# Altium PCB PCB_OSUKeyboard.pcbdoc
Units mil, origin at the board's own origin, x right, y up, seen from the top; angles counter-clockwise.
Board outline 4283.59 x 3769.8 mil, 2 copper layers (Top Layer, Bottom Layer); 79 components, 50 nets, 357 pads, 74 vias.
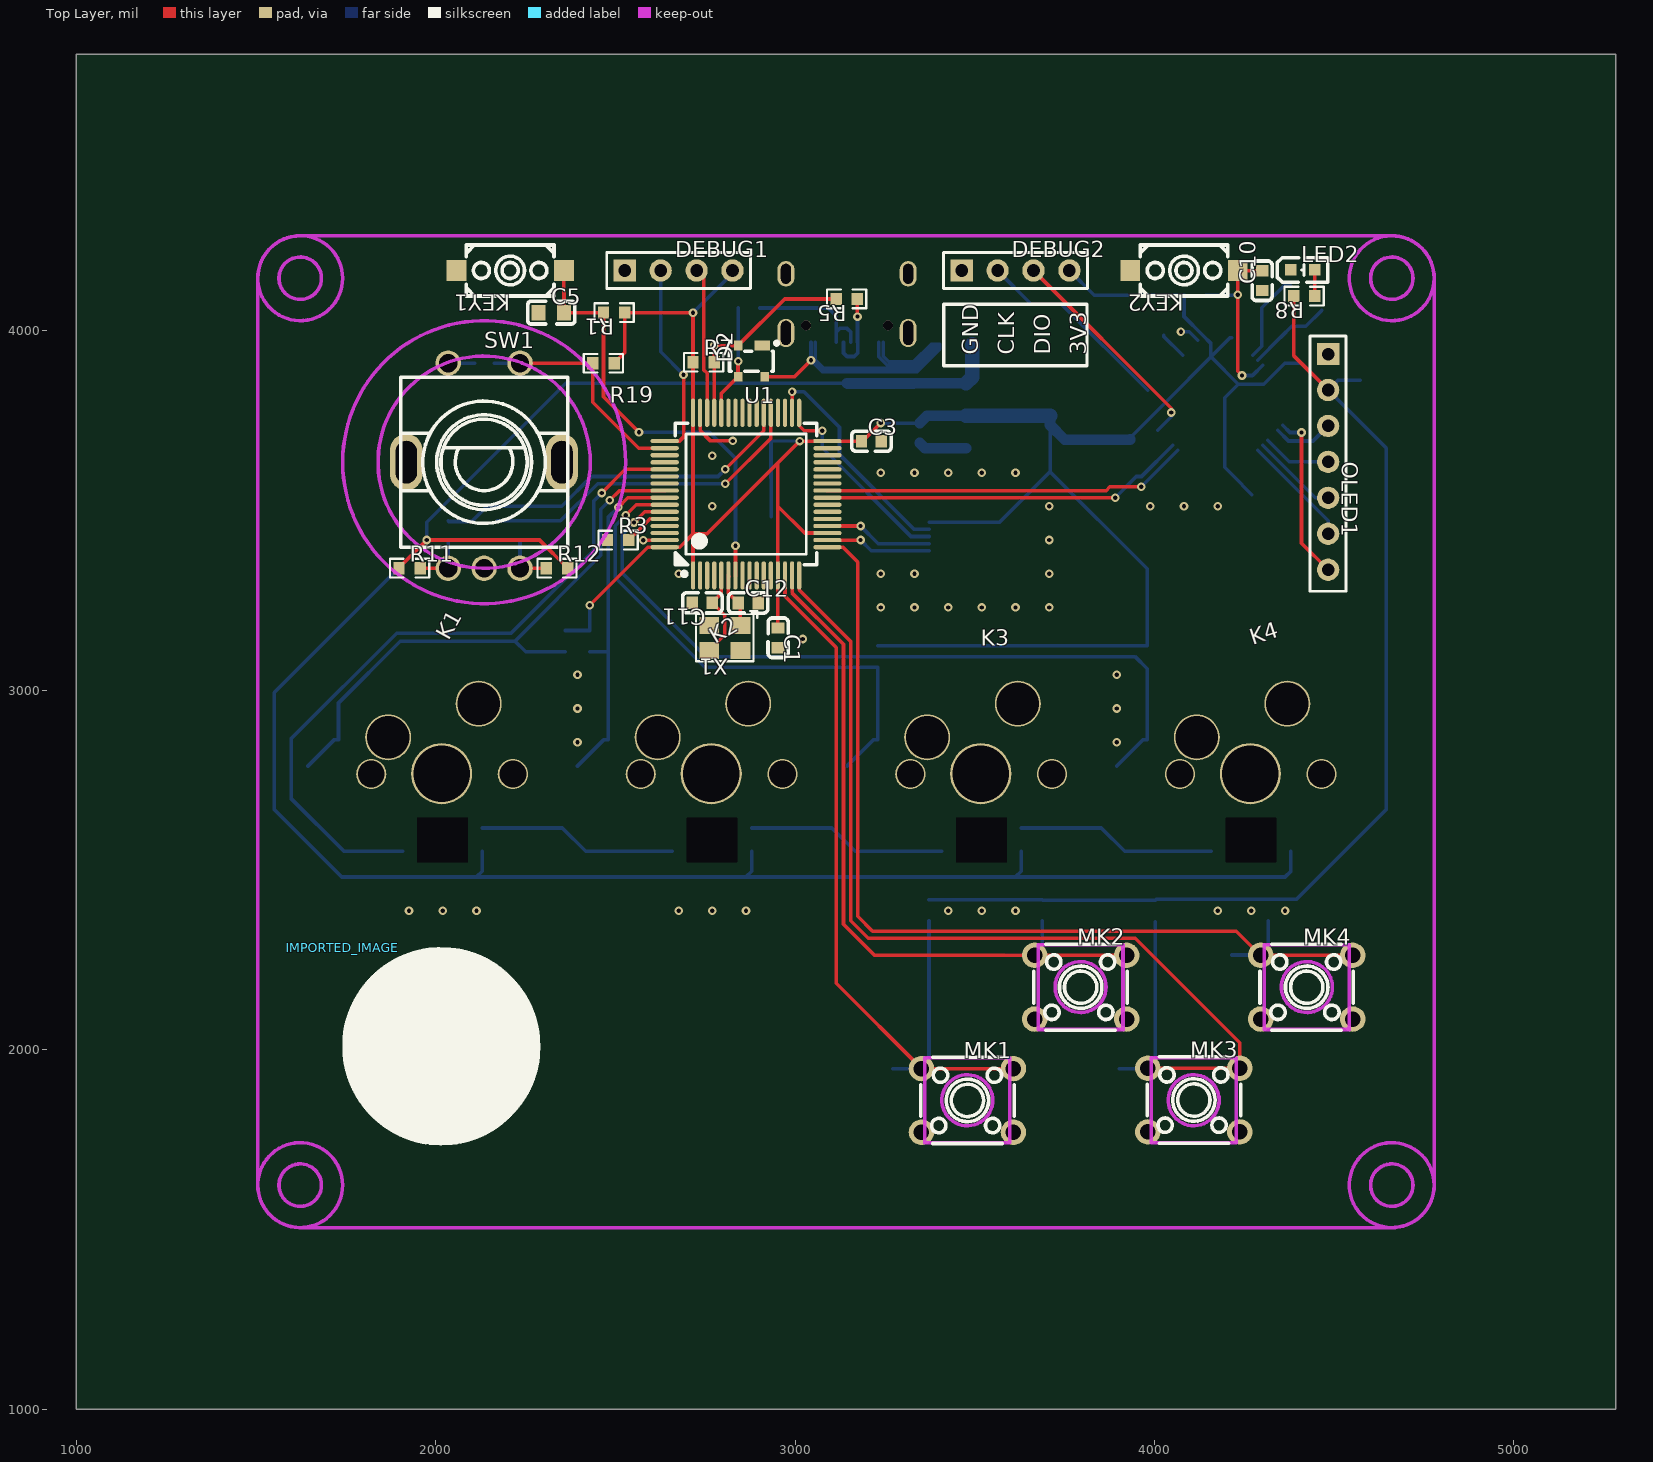
[diagram p0: Top Layer view]
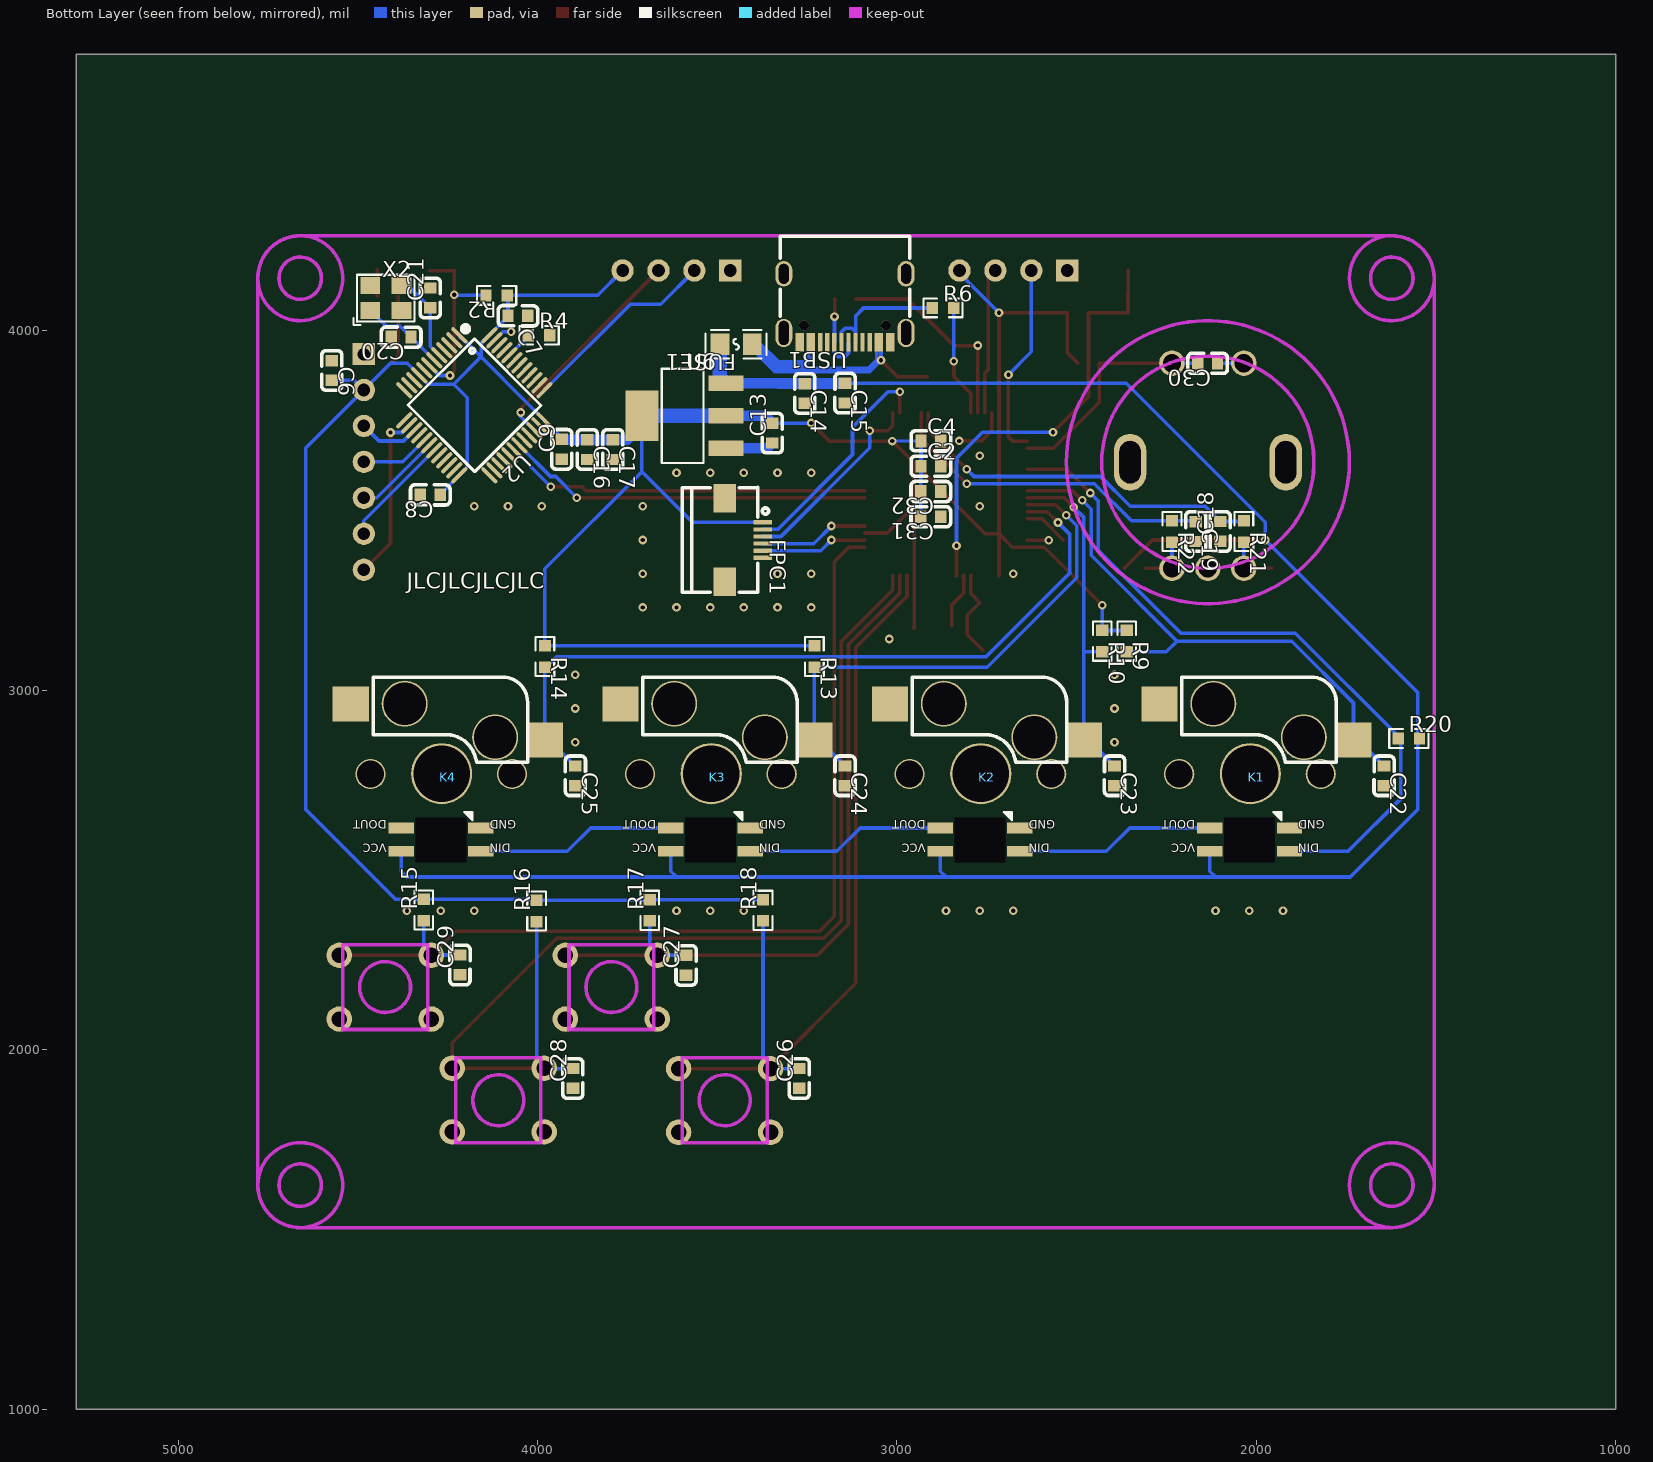
[diagram p1: Bottom Layer view, seen from below]

## Layer stack, top to bottom
Top Layer: signal copper (thickness not stored)
Dielectric: dielectric 12.6, FR-4, Dk 4.8
Bottom Layer: signal copper (thickness not stored)

## Board outline
5283.59,1000 1000,1000 1000,4769.8 5283.59,4769.8

## Components (designator, comment, footprint, x,y, rotation, side; value= is the part's Value field where it differs from the comment)
C1 "0.1u" C0603#1 2952.71,3145.9 r270 top
C2 "0.1u" C0603#2 2905.41,3623.5 r0 bottom
C3 "0.1u" C0603#1 3212.71,3692.9 r0 top
C4 "0.1u" C0603#2 2905.41,3693.9 r0 bottom
C5 "0.1u" C0603#3 2321.76,4050.9 r0 top
C6 "0.1u" C0603#2 4572.81,3889.9 r90 bottom
C7 "0.1u" C0603#2 4054.81,4041.9 r180 bottom
C8 "0.1u" C0603#2 4298.81,3543.9 r180 bottom
C9 "0.1u" C0603#2 3932.71,3670.9 r270 bottom
C10 "0.1u" C0603#1 4299.81,4139.9 r90 top
C11 "20pF" C0603#1 2741.76,3243.9 r180 top
C12 "20pF" C0603#1 2869.76,3242.9 r0 top
C13 "10u" C0603#2 3346.71,3715.9 r270 bottom
C14 "10u" C0603#2 3256.71,3825.9 r90 bottom
C15 "0.1u" C0603#2 3144.71,3826.9 r90 bottom
C16 "0.1u" C0603#2 3861.71,3669.9 r90 bottom
C17 "10u" C0603#2 3790.71,3669.9 r90 bottom
C18 "0.1u" C0603#2 2100.61,3442 r270 bottom
C19 "0.1u" C0603#2 2168.91,3441.4 r90 bottom
C20 "20p" C0603#2 4379.71,3982.9 r180 bottom
C21 "20p" C0603#2 4298.71,4091.9 r270 bottom
C22 "0.1u" C0603#2 1644.71,2761.9 r90 bottom
C23 "0.1u" C0603#2 2394.71,2761.9 r90 bottom
C24 "0.1u" C0603#2 3144.71,2761.9 r90 bottom
C25 "0.1u" C0603#2 3894.81,2761.9 r90 bottom
C26 "0.1u" C0603#2 3271.71,1919.9 r270 bottom
C27 "0.1u" C0603#2 3586.71,2234.9 r270 bottom
C28 "0.1u" C0603#2 3901.71,1919.9 r270 bottom
C29 "0.1u" C0603#2 4215.71,2235.9 r270 bottom
C30 "0.1u" C0603#2 2135.71,3909.9 r180 bottom
C31 "0.1u" C0603#2 2906.11,3482.9 r180 bottom
C32 "1u" C0603#2 2906.11,3553.3 r180 bottom
D2 "PRTR5V0U2X,215" SOT-143_L2.9-W1.3-P1.92-LS2.3-BR 2878.76,3915.9 r90 top
DEBUG1 "HDR-M-2.54_1x4" HDR-M-2.54_1X4 2676.01,4168.17 r0 top
DEBUG2 "HDR-M-2.54_1x4" HDR-M-2.54_1X4 3613.53,4168.17 r0 top
FPC1 "AFC01-S06FCA-00" FPC-SMD_P0.50-6P_AFC01-S06FCA-00 3426.01,3418.17 r90 bottom
FUSE1 "SMD0805B050TF" F0805 3447.76,3962.9 r180 bottom
IMPORTED_IMAGE "IMPORTED_IMAGE" IMPORTED_IMAGE 1740.94,2284.35 r0 top
K1 "凯华轴座下灯位" 凯华轴座下灯位 2016.83,2766.9 r0 top
K2 "凯华轴座下灯位" 凯华轴座下灯位 2766.84,2766.9 r0 top
K3 "凯华轴座下灯位" 凯华轴座下灯位 3516.86,2766.9 r0 top
K4 "凯华轴座下灯位" 凯华轴座下灯位 4266.87,2766.9 r0 top
KEY1 "K2-3.6×6.1_SMD" KEY-SMD_2P-L6.2-W3.6-LS8.0 2207.26,4168.17 r180 top
KEY2 "K2-3.6×6.1_SMD" KEY-SMD_2P-L6.2-W3.6-LS8.0 4082.3,4168.17 r180 top
LED2 "19-217/BHC-ZL1M2RY/3T" LED0603-R-RD_BLUE 4412.77,4169.9 r0 top
MK1 "K4-6×6_TH" KEY-TH_4P-L6.0-W6.0-P4.50-LS6.5 3479.76,1858.9 r0 top
MK2 "K4-6×6_TH" KEY-TH_4P-L6.0-W6.0-P4.50-LS6.5 3794.76,2173.9 r0 top
MK3 "K4-6×6_TH" KEY-TH_4P-L6.0-W6.0-P4.50-LS6.5 4109.76,1859.9 r0 top
MK4 "K4-6×6_TH" KEY-TH_4P-L6.0-W6.0-P4.50-LS6.5 4423.76,2173.9 r0 top
OLED1 "CONN_01X07" HDR-M-2.54_1X7 4483.31,3635.6 r270 top
R1 "10k" R0603#1 2496.71,4050.9 r180 top
R2 "10k" R0603#2 4113.81,4098.9 r180 bottom
R3 "10k" R0603#1 2507.71,3417.9 r0 top
R4 "10k" R0603#2 3995.81,3987.9 r0 bottom
R5 "22" R0603#1 3143.81,4088.9 r180 top
R6 "22" R0603#2 2871.71,4063.9 r0 bottom
R7 "1.5k" R0603#1 2745.71,3912.9 r0 top
R8 "1k" R0603#1 4416.81,4096.9 r180 top
R9 "10k" R0603#2 2360.71,3136.9 r90 bottom
R10 "10k" R0603#2 2428.71,3136.9 r90 bottom
R11 "10k" R0603#1 1927.71,3339.9 r0 top
R12 "10k" R0603#1 2337.71,3339.9 r0 top
R13 "10k" R0603#2 3229.71,3093.9 r90 bottom
R14 "10k" R0603#2 3979.71,3093.9 r90 bottom
R15 "10k" R0603#2 4316.71,2388.9 r270 bottom
R16 "10k" R0603#2 4002.71,2385.9 r270 bottom
R17 "10k" R0603#2 3687.71,2387.9 r270 bottom
R18 "10k" R0603#2 3372.71,2387.9 r270 bottom
R19 "10k" R0603#1 2466.76,3909.9 r0 top
R20 "10k" R0603#2 1575.71,2865.9 r0 bottom
R21 "10k" R0603#2 2034.71,3441.7 r90 bottom
R22 "10k" R0603#2 2234.71,3441.7 r90 bottom
SW1 "EC11E18244A5" SW-TH_EC11E18244A5 2134.76,3624.9 r0 top
U1 "STM32F303RBT6" LQFP-64_L10.0-W10.0-P0.50-LS12.0-BL 2863.76,3545.9 r0 top
U2 "STM32F030CCT6" LQFP-48_L7.0-W7.0-P0.50-LS9.0-BL 4176.05,3793.16 r135 bottom
U6 "AMS1117-3.3" SOT-223-3_L6.5-W3.4-P2.30-LS7.0-BR 3592.76,3763.9 r0 bottom
USB1 "KH-TYPE-C-16P" USB-C-SMD_KH-TYPE-C-16P 3144.78,4063.9 r180 bottom
X1 "8MHz" OSC-SMD_4P-L3.2-W2.5-BL#1 2804.76,3145.9 r180 top
X2 "8MHz" OSC-SMD_4P-L3.2-W2.5-BL#2 4422.29,4091.43 r0 bottom

## Footprints (in the part's own frame and the unit in brackets; to place one, negate y for a bottom-side part, rotate by r counter-clockwise, add the part's x,y. Pads: shape width x height; smd on the part's side, far side on the other; paste and mask are expansions set on the pad)
C0603#1 [mm]
  rect 0.8x0.9 smd paste+0 mask+0.051: 1(-0.7,0) 2(0.7,0)
  silkscreen extent -1.41,-0.71 1.39,0.72
C0603#2 [mm]
  rect 0.8x0.9 smd paste+0 mask+0.051: 1(0.7,0) 2(-0.7,0)
  silkscreen extent -1.39,-0.72 1.41,0.71
C0603#3 [mm]
  rect 1x1.1 smd paste+0 mask+0.102: 1(-0.9,0) 2(0.9,0)
  silkscreen extent -1.65,-0.8 1.65,0.8
F0805 [mm]
  rect 1.335x1.5 smd paste-100 mask+0.051: 1(1.142,0) 2(-1.142,0)
  silkscreen extent -2.16,-1.02 2.16,1.02
FPC-SMD_P0.50-6P_AFC01-S06FCA-00 [mm]
  rect 0.3x1.3 smd paste+0 mask+0.051: 1(1.248,-1.339) 2(0.748,-1.339) 3(0.248,-1.339) 4(-0.252,-1.339) 5(-0.752,-1.339) 6(-1.252,-1.339)
  rect 2x1.6 smd paste+0 mask+0.051: 7(2.95,1.339) 8(-2.95,1.339)
  silkscreen extent -3.7,-1.75 3.72,4.36
HDR-M-2.54_1X4 [mil]
  rect 62x62 hole 35 paste+0 mask+2: 1(-150,0)
  round 62 hole 35 paste+0 mask+2: 2(-50,0) 3(50,0) 4(150,0)
  silkscreen extent -200,-50 200,50
HDR-M-2.54_1X7 [mil]
  rect 62x62 hole 35 paste+0 mask+2: 1(-300,0)
  round 62 hole 35 paste+0 mask+2: 2(-200,0) 3(-100,0) 4(0,0) 5(100,0) 6(200,0) 7(300,0)
  silkscreen extent -350,-50 360,50
IMPORTED_IMAGE [mil]
  silkscreen extent 0,-550 550,0
KEY-SMD_2P-L6.2-W3.6-LS8.0 [mm]
  rect 1.4x1.5 smd paste+0 mask+0.051: 1(-3.8,0) 2(3.8,0)
  silkscreen extent -3.1,-1.8 3.1,1.8
KEY-TH_4P-L6.0-W6.0-P4.50-LS6.5 [mm]
  round 1.8 hole 1.1 paste+0 mask+0.051: 1(-3.251,-2.25) 2(3.251,-2.25) 3(3.251,2.25) 4(-3.251,2.25)
  silkscreen extent -3.3,-3.05 3.3,3.05
LED0603-R-RD_BLUE [mm]
  rect 0.8x0.8 smd paste+0 mask+0.051: 1(0.851,0) 2(-0.851,0)
  silkscreen extent -1.82,-0.86 1.77,0.86
LQFP-48_L7.0-W7.0-P0.50-LS9.0-BL [mm]
  oval 0.27x1.5 smd paste+0 mask+0.05: 1(2.75,4.25) 2(2.25,4.25) 3(1.75,4.25) 4(1.25,4.25) 5(0.75,4.25) 6(0.25,4.25) 7(-0.25,4.25) 8(-0.75,4.25) 9(-1.25,4.25) 10(-1.75,4.25) 11(-2.25,4.25) 12(-2.75,4.25) 25(-2.75,-4.25) 26(-2.25,-4.25) 27(-1.75,-4.25) 28(-1.25,-4.25) 29(-0.75,-4.25) 30(-0.25,-4.25) 31(0.25,-4.25) 32(0.75,-4.25) 33(1.25,-4.25) 34(1.75,-4.25) 35(2.25,-4.25) 36(2.75,-4.25)
  oval 1.5x0.27 smd paste+0 mask+0.05: 13(-4.25,2.75) 14(-4.25,2.25) 15(-4.25,1.75) 16(-4.25,1.25) 17(-4.25,0.75) 18(-4.25,0.25) 19(-4.25,-0.25) 20(-4.25,-0.75) 21(-4.25,-1.25) 22(-4.25,-1.75) 23(-4.25,-2.25) 24(-4.25,-2.75) 37(4.25,-2.75) 38(4.25,-2.25) 39(4.25,-1.75) 40(4.25,-1.25) 41(4.25,-0.75) 42(4.25,-0.25) 43(4.25,0.25) 44(4.25,0.75) 45(4.25,1.25) 46(4.25,1.75) 47(4.25,2.25) 48(4.25,2.75)
  silkscreen extent -3.3,-3.34 3.59,4.46
LQFP-64_L10.0-W10.0-P0.50-LS12.0-BL [mm]
  oval 0.3x2 smd paste+0 mask+0.051: 1(-3.75,-5.75) 2(-3.25,-5.75) 3(-2.75,-5.75) 4(-2.25,-5.75) 5(-1.75,-5.75) 6(-1.25,-5.75) 7(-0.75,-5.75) 8(-0.25,-5.75) 9(0.25,-5.75) 10(0.75,-5.75) 11(1.25,-5.75) 12(1.75,-5.75) 13(2.25,-5.75) 14(2.75,-5.75) 15(3.25,-5.75) 16(3.75,-5.75) 33(3.75,5.75) 34(3.25,5.75) 35(2.75,5.75) 36(2.25,5.75) 37(1.75,5.75) 38(1.25,5.75) 39(0.75,5.75) 40(0.25,5.75) 41(-0.25,5.75) 42(-0.75,5.75) 43(-1.25,5.75) 44(-1.75,5.75) 45(-2.25,5.75) 46(-2.75,5.75) 47(-3.25,5.75) 48(-3.75,5.75)
  oval 2x0.3 smd paste+0 mask+0.051: 17(5.75,-3.75) 18(5.75,-3.25) 19(5.75,-2.75) 20(5.75,-2.25) 21(5.75,-1.75) 22(5.75,-1.25) 23(5.75,-0.75) 24(5.75,-0.25) 25(5.75,0.25) 26(5.75,0.75) 27(5.75,1.25) 28(5.75,1.75) 29(5.75,2.25) 30(5.75,2.75) 31(5.75,3.25) 32(5.75,3.75) 49(-5.75,3.75) 50(-5.75,3.25) 51(-5.75,2.75) 52(-5.75,2.25) 53(-5.75,1.75) 54(-5.75,1.25) 55(-5.75,0.75) 56(-5.75,0.25) 57(-5.75,-0.25) 58(-5.75,-0.75) 59(-5.75,-1.25) 60(-5.75,-1.75) 61(-5.75,-2.25) 62(-5.75,-2.75) 63(-5.75,-3.25) 64(-5.75,-3.75)
  silkscreen extent -5,-5.79 5,5
OSC-SMD_4P-L3.2-W2.5-BL#1 [mm]
  rect 1.4x1.2 smd paste+0 mask+0.051: 1(-1.1,-0.875) 2(1.1,-0.875) 3(1.1,0.875) 4(-1.1,0.875)
  silkscreen extent -2.29,-1.9 2.03,1.65
OSC-SMD_4P-L3.2-W2.5-BL#2 [mm]
  rect 1.4x1.2 smd paste+0 mask+0.051: 1(1.1,0.875) 2(-1.1,0.875) 3(-1.1,-0.875) 4(1.1,-0.875)
  silkscreen extent -2.03,-1.65 2.29,1.9
R0603#1 [mil]
  rect 31.75x34.02 smd paste-3937.01 mask+2: 1(-29.66,0) 2(29.65,0)
  silkscreen extent -55,-26 55,26
R0603#2 [mil]
  rect 31.75x34.02 smd paste-3937.01 mask+2: 1(29.66,0) 2(-29.65,0)
  silkscreen extent -55,-26 55,26
SOT-143_L2.9-W1.3-P1.92-LS2.3-BR [mm]
  rect 0.7x1.1 smd paste+0 mask+0.051: 1(1.1,-0.75)
  rect 0.7x0.6 smd paste+0 mask+0.051: 2(1.1,0.95) 3(-1.1,0.95) 4(-1.1,-0.95)
  silkscreen extent -0.7,-1.91 1.4,1.55
SOT-223-3_L6.5-W3.4-P2.30-LS7.0-BR [mm]
  rect 2.5x1.1 smd paste+0 mask+0.051: 1(-2.97,2.3) 2(-2.97,0) 3(-2.97,-2.3)
  rect 2.34x3.6 smd paste+0 mask+0.051: 4(2.97,0)
  silkscreen extent -1.37,-3.33 1.57,3.33
SW-TH_EC11E18244A5 [mm]
  oval 2.3x4 hole 1.5 slot 3 at 90 deg paste+0 mask+0.051: 6(5.5,0.25) 7(-5.5,0.25)
  round 1.8 hole 1.3 paste+0 mask+0.051: A(-2.54,-7.25) B(2.54,-7.25) C(0,-7.25) D(-2.54,7.25) E(2.54,7.25)
  silkscreen extent -5.9,-5.75 5.9,6.25
USB-C-SMD_KH-TYPE-C-16P [mm]
  oval 1.2x2 hole 0.7 slot 1.7 at 90 deg paste+0 mask+0.051: 1(4.32,-1.765) 2(-4.32,-1.765)
  oval 1.2x1.8 hole 0.7 slot 1.4 at 90 deg paste+0 mask+0.051: 3(4.32,2.415) 4(-4.32,2.415)
  rect 0.3x1.3 smd paste-100 mask+0.05: A1(3.35,-2.415) A4(2.55,-2.415) A5(1.25,-2.415) A6(0.25,-2.415) A7(-0.25,-2.415) A8(-1.25,-2.415) A9(-2.55,-2.415) A12(-3.35,-2.415) B1(-3.05,-2.415) B4(-2.25,-2.415) B5(-1.75,-2.415) B6(-0.75,-2.415) B7(0.75,-2.415) B8(1.75,-2.415) B9(2.25,-2.415) B12(3.05,-2.415)
  round 0.7 hole 0.7 unplated paste+0: ""(-2.89,-1.235) ""(2.89,-1.235)
  silkscreen extent -4.57,-0.57 4.57,5.08
凯华轴座下灯位 [mil]
  rect 100.39x98.42 smd far side paste+0 mask+4: COL(-287.08,95) ROW(252.92,195)
  rect 70.87x29.53 smd far side paste+0 mask+4: DIN(-109.08,-215) DOUT(112.92,-150) GND(-109.08,-150) VCC(112.92,-215)
  round 84 hole 74.8 unplated paste+0 mask+4: ""(-196.08,0) ""(197.92,0)
  round 128 hole 118.11 paste+0 mask+4: ""(-149.08,102) ""(102.92,196)
  round 170 hole 157.48 paste+0 mask+4: ""(-0.08,1)
  Multi-Layer board cut-out: 71.92,-246 71.92,-121.59 -68.24,-121.59 -68.24,-246

## Free pads (board coordinates)
  rect 11.81x51.18 smd paste+0 mask+2: 2(2755.48,3772.26)

## Via types
v1: diameter 24, hole 12, Top Layer to Bottom Layer, tented both sides, 74 vias

## Nets (pads, with @x,y where several pads share a name; then routed paths per layer and width w, separated by ;. In a path a pad name is that pad's centre, name@x,y a point inside that pad or via, vN(x,y) a via of type N, cw(c..) or ccw(c..) an arc to the next point about the centre after c; other vN are vias at no path point)
+5V: C14.1 C15.1 FUSE1.2 K1.VCC K2.VCC K3.VCC K4.VCC R11.1 R12.2 R20.2 U6.3 | length 6488.9
  Top Layer w10: R11.1 1898.1,3340.9 v1(1975.37,3418.17) 2289.15,3418.17 R12.2
  Bottom Layer w10: v1(1975.37,3418.17) 1550.97,2993.77 1550.97,2668.15 1738.48,2480.65 2113.49,2480.65 ; v1(1975.37,3418.17) 1975.41,3467.6 2362.31,3854.5 C15.1 ; K1.VCC 2129.74,2496.91 2113.49,2480.65 ; K2.VCC 2879.76,2496.91 2863.5,2480.65 ; K3.VCC 3629.77,2496.9 3613.52,2480.65 ; K4.VCC 4379.79,2496.91 4363.53,2480.65 3613.52,2480.65 ; 2113.49,2480.65 2863.5,2480.65 ; 2863.5,2480.65 3613.52,2480.65
  Bottom Layer w30: C15.1@3144.76,3854.45 3145.76,3853.45 3256.76,3853.45 3329.31,3853.45 3330.31,3854.45 U6.3@3475.83,3854.45
  Bottom Layer w40: U6.3@3475.81,3854.5 3492.71,3871.4 FUSE1.2
ADC1: FPC1.5 U1.18 | length 295.2
  Top Layer w10: U1.18 3144.76,3418.01 v1@3182.22,3418.09
  Bottom Layer w10: v1(3182.39,3418.09) 3211.92,3388.56 FPC1.5
ADC2: FPC1.4 U1.20 | length 303.7
  Top Layer w10: U1.20 v1@3182.56,3457.31
  Bottom Layer w10: v1(3182.39,3457.31) 3231.46,3408.24 FPC1.4
ADC3: FPC1.3 U1.33 | length 553.3
  Top Layer w10: U1.33 3011.39,3736.26 3025.76,3721.9 v1(3075.76,3721.9)
  Bottom Layer w10: v1@3075.72,3721.9 3075.72,3674.7 3322.48,3427.93 FPC1.3
ADC4: FPC1.2 U1.34 | length 643.5
  Top Layer w10: U1.34 2991.76,3772.32 v1(2991.76,3830.9)
  Bottom Layer w10: v1@2991.72,3830.9 3024.71,3830.9 3123.71,3731.9 3123.71,3655.9 3332,3447.61 FPC1.2
DN: R6.1 USB1.A7 USB1.B7 | length 399.9
  Bottom Layer w10: R6.1 3093.11,4063.9 3115.21,4040.7 USB1.B7 3115.21,3997.4 3124.71,4006.9 3144.71,4006.9 3154.61,3997 USB1.A7
DP: R5.1 USB1.A6 USB1.B6 | length 228.3
  Top Layer w10: R5.1@3173.41,4088.9 3173.41,4040.3 v1(3173.77,4039.9)
  Bottom Layer w10: USB1.A6 3134.91,3938.7 3144.81,3928.9 3164.81,3928.9 3174.31,3938.4 USB1.B6 3173.81,3969.3 v1(3173.77,4039.9)
EC11A: C18.2 R21.1 U1.38 | length 1033.7
  Top Layer w10: v1(2805.76,3614.9) 2913.01,3722.15 U1.38
  Bottom Layer w10: R21.1@2034.76,3471.41 2036.56,3469.61 C18.2 2142.95,3511.92 2350.73,3511.92 2433.71,3594.9 2785.72,3594.9 v1@2805.72,3614.9
EC11B: C19.1 R22.1 U1.37 | length 931.5
  Top Layer w10: v1(2806.21,3574.4) 2932.61,3700.8 U1.37@2932.61,3772.3
  Bottom Layer w10: C19.1 2171.29,3471.41 2234.76,3471.41 2347.22,3471.41 2450.71,3574.9 v1(2806.21,3574.4)
GND: C1.2 C2.2 C3.2 C4.2 C5.1 C6.1 C7.1 C8.2 C9.1 C10.1 C11.2 C12.2 C13.1 C14.2 C15.2 C16.2 C17.2 C18.1 C19.2 C20.2 C21.2 C22.2 C23.2 C24.2 C25.2 C26.1 C27.1 C28.1 C29.1 C30.1 C31.1 C32.1 D2.1 DEBUG1.1 DEBUG2.1 FPC1.6 K1.GND K1.ROW K2.GND K2.ROW K3.GND K3.ROW K4.GND K4.ROW KEY1.2 KEY2.2 LED2.2 MK1.1 MK1.2 MK2.1 MK2.2 MK3.1 MK3.2 MK4.1 MK4.2 OLED1.1 R3.1 R4.2 SW1.6 SW1.7 SW1.C SW1.D U1.12 U1.31 U1.47 U1.63 U2.8 U2.23 U2.35 U2.47 U6.1 USB1.1 USB1.2 USB1.3 USB1.4 USB1.A1 USB1.A12 USB1.B1 USB1.B12 X1.2 X1.4 X2.2 X2.4 | length 477.4
  Top Layer w10: v1(2577.76,3417.9) 2637.35,3417.9 U1.63 ; U1.47 2735.8,3722.85 2764.75,3693.9 v1(2826.76,3693.9)
  Bottom Layer w10: SW1.D 2107.78,3910.33 C30.1 ; v1(4073.76,3997.9) 4096.57,3997.9 U2.47
  Bottom Layer w30: C13.1@3346.76,3688.34 3361.74,3673.35 U6.1@3475.83,3673.35
  other v1: 1925.98,2386.9 2019.73,2386.9 2113.48,2386.9 2676,2386.9 2769.75,2386.9 2863.5,2386.9 3426.01,2386.9 3519.76,2386.9 3613.52,2386.9 4176.03,2386.9 4269.78,2386.9 4363.53,2386.9 2394.74,2855.66 3894.77,2855.66 2394.74,2949.41 3894.77,2949.41 2394.74,3043.16 3894.77,3043.16 3021.76,3142.9 3238.51,3230.66 3332.26,3230.66 3426.01,3230.66 3426.01,3230.66 3519.76,3230.66 3613.52,3230.66 3707.27,3230.66 2676,3324.42 3238.51,3324.42 3332.26,3324.42 3707.27,3324.42 3707.27,3418.17 2769.75,3511.92 3707.27,3511.92 3988.52,3511.92 4082.28,3511.92 4176.03,3511.92 3238.51,3605.67 3332.26,3605.67 3426.01,3605.67 3519.76,3605.67 3613.52,3605.67 2769.76,3652.9
K1_DOUT: K1.DOUT K2.DIN | length 555
  Bottom Layer w10: K1.DOUT 2352.21,2616.9 2417.21,2551.9 K2.DIN
K2_DOUT: K2.DOUT K3.DIN | length 555
  Bottom Layer w10: K2.DOUT@2879.71,2616.9 3102.21,2616.9 3167.31,2551.9 K3.DIN
K3_DOUT: K3.DOUT K4.DIN | length 554.9
  Bottom Layer w10: K3.DOUT 3852.31,2616.9 3917.31,2551.9 K4.DIN
K_1: C22.1 K1.COL R9.2 U1.56 | length 1597.6
  Top Layer w10: v1@2484.71,3528.9 2511.61,3555.7 U1.56
  Bottom Layer w10: C22.1 1717.16,2861.9 K1.COL ; K1.COL 1729.71,2964.9 1901.81,3136.9 2220.81,3136.9 ; R9.2@2360.76,3107.24 2250.48,3107.24 2220.81,3136.9 ; v1@2484.71,3528.9 2459.71,3503.9 2459.71,3375.9 2220.81,3136.9
  other v1: 2484.76,3528.9
K_2: C23.1 K2.COL R10.2 U1.57 | length 965.5
  Top Layer w10: v1(2507.76,3508.9) 2534.91,3536.1 U1.57
  Bottom Layer w10: C23.1 2467.18,2861.9 K2.COL ; R10.2@2428.76,3107.24 2479.71,3107.24 ; K2.COL@2479.71,2861.9 2479.71,3480.9 v1(2507.76,3508.9)
K_3: C24.1 K3.COL R13.2 U1.58 | length 1457.1
  Top Layer w10: v1@2528.71,3486.9 2558.21,3516.4 U1.58
  Bottom Layer w10: v1@2528.71,3486.9 2499.71,3457.9 2499.71,3313.2 2748.68,3064.24 R13.2@3229.76,3064.24 ; C24.1@3144.76,2789.47 3217.2,2861.9 K3.COL ; R13.2 K3.COL
  other v1: 2528.75,3486.9
K_4: C25.1 K4.COL R14.2 U1.59 | length 2135.5
  Top Layer w10: v1(2551.76,3466.9) 2581.51,3496.7 U1.59
  Bottom Layer w10: v1(2551.76,3466.9) 2519.71,3434.9 2519.71,3325.9 2751.71,3093.9 3945.71,3093.9 3979.81,3059.8 K4.COL 3967.21,2861.9 C25.1
LED2_1: LED2.1 R8.1 | length 73
  Top Layer w10: LED2.1 R8.1@4446.41,4096.9
MK_1: C26.2 MK1.3 MK1.4 R18.1 U1.14 | length 2284.9
  Top Layer w10: U1.14 2972.01,3261.6 3114.71,3118.9 3114.71,2184.5 MK1.4 ; MK1.4 MK1.3
  Bottom Layer w10: C26.2@3271.76,1947.45 MK1.4 MK1.4 ; MK1.4 3372.76,1968.51 R18.1@3372.76,2358.24
MK_2: C27.2 MK2.3 MK2.4 R17.1 U1.15 | length 2038.3
  Top Layer w10: U1.15 2991.7,3270.95 3134.76,3127.9 3134.76,2348.9 3221.2,2262.46 3564.76,2262.46 ; 3564.71,2262.5 MK2.4 ; MK2.4 MK2.3
  Bottom Layer w10: C27.2@3586.76,2262.45 MK2.4 MK2.4 ; MK2.4 3687.76,2283.51 R17.1@3687.76,2358.24
MK_3: C28.2 MK3.3 MK3.4 R16.1 U1.16 | length 3067
  Top Layer w10: U1.16 3011.41,3279.3 3154.71,3135.9 3154.71,2358.9 3203.71,2309.9 3946.71,2309.9 4237.71,2018.9 MK3.3@4237.71,1948.5 ; MK3.4 MK3.3
  Bottom Layer w10: C28.2@3901.76,1947.45 3980.72,1947.45 MK3.4 4002.76,1969.51 R16.1@4002.76,2356.24
MK_4: C29.2 MK4.3 MK4.4 R15.1 U1.17 | length 2696
  Top Layer w10: U1.17@3090.11,3398.2 3133.41,3398.2 3174.71,3356.9 3174.71,2370.9 3215.71,2329.9 4227.41,2329.9 MK4.4@4295.81,2261.5 ; MK4.4 MK4.3
  Bottom Layer w10: C29.2@4215.76,2263.45 4294.86,2263.45 MK4.4 ; MK4.4 4316.76,2283.51 R15.1@4316.76,2359.24
NRST1: C5.2 KEY1.1 R1.2 U1.7 | length 1225.5
  Top Layer w10: KEY1.1@2356.81,4168.2 C5.2 R1.2 2467.11,3816.6 v1(2565.76,3717.9) ; U1.7 v1(2834.22,3401.87)
  Bottom Layer w10: v1(2565.76,3717.9) 2761.72,3717.9 2834.22,3645.4 v1(2834.22,3401.87)
NRST2: C10.2 KEY2.1 R2.2 U2.7 | length 523.6
  Top Layer w10: v1(4231.89,4100.26) 4231.89,3887.76 v1(4243.76,3875.9) ; v1(4231.89,4100.26) KEY2.1 C10.2
  Bottom Layer w10: R2.2@4143.41,4098.9 4230.51,4098.9 v1(4231.89,4100.26) ; v1(4243.76,3875.9) 4272.7,3875.9 U2.7
OLED_CS: OLED1.7 U2.14 | length 473.1
  Top Layer w10: v1(4409.31,3717.5) 4409.31,3409.6 OLED1.7
  Bottom Layer w10: U2.14 4377.01,3717.5 v1(4409.31,3717.5)
OLED_DC: OLED1.6 U2.19 | length 313.4
  Bottom Layer w10: U2.19 4483.31,3472 OLED1.6
OLED_MOSI: OLED1.4 U2.17 | length 193
  Bottom Layer w10: U2.17 4375.31,3635.6 OLED1.4
OLED_RES: OLED1.5 U2.18 | length 242.6
  Bottom Layer w10: U2.18 4447.51,3535.6 OLED1.5
OLED_SCK: OLED1.3 U2.15 | length 170
  Bottom Layer w10: U2.15 4373.11,3693.6 4441.31,3693.6 OLED1.3
S$81355: 
SPI3_MOSI: K1.DIN R20.1 U1.53 | length 1968
  Top Layer w10: v1(2461.76,3548.9) 2527.61,3614.8 U1.53
  Bottom Layer w10: K1.DIN 1744.71,2551.9 1597.71,2698.9 1597.71,2864.9 1891.71,3158.9 2209.71,3158.9 2439.71,3388.9 2439.71,3526.9 v1(2461.76,3548.9)
SPIN1: C30.2 R19.1 SW1.E U1.50 | length 635.6
  Top Layer w10: SW1.E@2234.71,3910.3 R19.1 2437.11,3801.6 2564.81,3673.8 U1.50
  Bottom Layer w10: C30.2 2163.74,3910.33 SW1.E
SW1_A: R11.2 R21.2 SW1.A | length 150.1
  Top Layer w10: R11.2 1957.85,3339.46 SW1.A
  Bottom Layer w10: SW1.A R21.2@2034.76,3412.09
SW1_B: R12.1 R22.2 SW1.B | length 146.2
  Top Layer w10: SW1.B 2307.66,3339.46 R12.1
  Bottom Layer w10: SW1.B R22.2@2234.76,3412.09
SWCLK1: DEBUG1.2 U1.49 | length 546.8
  Top Layer w10: U1.49 2678.39,3693.53 2689.76,3704.9 v1(2689.76,3877.9)
  Bottom Layer w10: DEBUG1.2 2626.02,3941.64 v1(2689.76,3877.9)
SWCLK2: DEBUG2.2 U2.37 | length 555.7
  Bottom Layer w10: DEBUG2.2 3657.31,4074.4 3741.61,4074.4 U2.37
SWDIO1: DEBUG1.3 pad.2 U1.46 | length 408.1
  Top Layer w10: DEBUG1.3 2745.48,4148.71 2745.48,3892.26 2755.48,3882.26 pad.2
SWDIO2: DEBUG2.3 U2.34 | length 618.9
  Top Layer w10: DEBUG2.3 4046.76,3784.94 v1(4046.76,3772.9)
  Bottom Layer w10: U2.34 4046.76,3761.35 v1(4046.76,3772.9)
U1_5: C11.1 U1.5 X1.3 | length 251.2
  Top Layer w10: X1.3@2761.41,3111.4 2804.71,3154.8 2804.71,3208.5 C11.1 2794.81,3269.4 U1.5@2794.81,3319.5
U1_6: C12.1 U1.6 X1.1 | length 156.9
  Top Layer w10: U1.6 2814.51,3270.6 C12.1 2848.06,3237.04 X1.1 ; U1.6 U1.6@2817.24,3316.82
U1_60: R3.2 U1.60 | length 124.4
  Top Layer w10: R3.2 2596.5,3476.99 U1.60
U1RX: U1.25 U2.30 | length 1021
  Top Layer w10: U1.25 3865.61,3555.7 3876.01,3566.1 v1(3962.93,3566.12)
  Bottom Layer w10: v1(3962.93,3566.12) U2.30
U1TX: U1.24 U2.31 | length 1021.2
  Top Layer w10: U1.24@3090.11,3535.9 v1(3890.76,3535.9)
  Bottom Layer w10: v1@3890.71,3535.9 3949.71,3594.9 3963.91,3594.9 U2.31
U2_5: C21.1 U2.5 X2.3 | length 248.2
  Bottom Layer w10: U2.5 4298.76,3957.63 4298.76,4064.34 4360.31,4125.88 X2.3
U2_6: C20.1 U2.6 X2.1 | length 235.6
  Bottom Layer w10: U2.6 4351.89,3982.9 C20.1 4382.2,4012.9 4421.51,4012.9 X2.1
U2_44: R4.1 U2.44 | length 77.6
  Bottom Layer w10: R4.1@4025.41,3987.9 4025.41,3985.5 U2.44@4078.61,3932.3
USB_DN: D2.3 R6.2 U1.44 | length 311.2
  Top Layer w10: U1.44 2794.86,3826.09 D2.3 2841.35,3915.49 v1(2841.76,3915.9)
  Bottom Layer w10: v1(2841.76,3915.9) 2841.76,4063.55 R6.2
USB_DP: D2.2 R5.2 R7.2 U1.45 | length 579.6
  Top Layer w10: U1.45 2775.21,3912.7 R7.2 v1(2775.41,3959.29) 2775.5,3959.2 D2.2 2971.05,4088.9 R5.2@3114.12,4088.9
VBUS: D2.4 FUSE1.1 USB1.A4 USB1.A9 USB1.B4 USB1.B9 | length 1509
  Top Layer w10: D2.4 2998.7,3872.59 v1(3044.41,3918.3)
  Bottom Layer w10: USB1.A4 v1(3044.41,3918.3) 3075.71,3886.9 3339.71,3886.9 3402.81,3949.9 FUSE1.1 ; USB1.B9 3056.21,3919.5 3079.71,3895.9 3335.81,3895.9 FUSE1.1 ; USB1.B4@3233.31,3968.8 3233.31,3928.3 3256.71,3904.9 3332.71,3904.9 3390.71,3962.9 FUSE1.1 ; USB1.A9 3245.21,3929.5 3260.71,3913.9 3329.71,3913.9 3378.71,3962.9 FUSE1.1
VCC: C1.1 C2.1 C3.1 C4.1 C6.2 C7.2 C8.1 C9.2 C13.2 C16.1 C17.1 C31.2 C32.2 DEBUG1.4 DEBUG2.4 FPC1.1 OLED1.2 R1.1 R2.1 R7.1 R8.2 R9.1 R10.1 R13.1 R14.1 R15.2 R16.2 R17.2 R18.2 R19.2 U1.1 U1.13 U1.19 U1.32 U1.48 U1.64 U2.1 U2.9 U2.24 U2.36 U2.48 U6.2 U6.4 | length 10778.7
  Top Layer w10: v1(2428.75,3236.9) 2590.11,3398.25 U1.64 ; R19.2 2526.37,3939.85 R1.1 ; R1.1 v1(2716.11,4050.9) R7.1 U1.48 U1.1 ; U1.64@2637.41,3398.2 2679.31,3398.2 2716.11,3435.1 2754.65,3435.08 v1(3013.09,3693.52) ; 2952.31,3511.9 3026.61,3437.6 U1.19 ; C1.1@2952.81,3173.4 2952.31,3173.9 U1.13 2952.31,3632.8 v1(3013.09,3693.52) ; v1(3238.76,3743.9) 3187.76,3692.9 C3.1 3184.51,3693.5 U1.32 v1(3013.09,3693.52) ; R8.2@4387.12,4096.9 4387.12,3931.79 OLED1.2
  Bottom Layer w10: R9.1@2360.76,3166.56 2428.76,3166.56 v1(2428.75,3236.9) ; v1(2716.11,4050.9) 2826.02,4160.81 DEBUG1.4 ; C31.2@2933.62,3482.9 2933.62,3553.3 C2.1 C4.1 v1(3013.09,3693.52) ; R13.1@3229.76,3123.56 3773.06,3123.56 3979.76,3123.56 3979.76,3338.03 3709.69,3608.1 ; v1@3238.71,3743.9 C13.2 ; R18.2@3372.76,2417.56 3687.76,2417.56 3689.76,2415.56 4002.76,2415.56 4005.76,2418.56 R15.2@4316.76,2418.56 ; FPC1.1 3568.9,3467.3 3709.69,3608.1 ; U6.4 3709.69,3608.1 ; DEBUG2.4 3832.8,4098.9 R2.1 ; C9.2@3932.76,3698.45 3932.76,3702.98 U2.36 ; U2.36 4210.41,3980.7 U2.1@4215.11,3980.7 ; R2.1@4084.11,4098.9 4082.31,4097.1 4082.31,4041.9 4082.31,4040 U2.48 4157.21,3965.1 4157.21,3927.4 ; 4157.31,3927.9 4233.31,3851.9 ; C8.1@4271.21,3543.9 U2.24 4195.71,3620.3 4195.71,3814.3 4233.31,3851.9 ; R15.2 4395.21,2418.6 4644.81,2668.2 4644.81,3674.1 OLED1.2 ; U2.9@4329.11,3876.7 4304.41,3851.9 4233.31,3851.9 ; U2.9 4362.38,3909.9 4409.02,3909.9 OLED1.2 ; C6.2 4510.01,3862.3 OLED1.2
  Bottom Layer w30: C13.2@3346.76,3743.46 3367.2,3763.9 U6.2 ; U6.4 3709.71,3738 3750.21,3697.5 C17.1 ; C17.1@3790.76,3697.45 3861.76,3697.45 3931.76,3697.45 C9.2@3932.76,3698.45
  Bottom Layer w40: U6.2 U6.4
pads on no net: FPC1.7 FPC1.8 K1. K2. K3. K4. K4.DOUT U1.2 U1.3 U1.4 U1.8 U1.9 U1.10 U1.11 U1.21 U1.22 U1.23 U1.26 U1.27 U1.28 U1.29 U1.30 U1.35 U1.36 U1.39 U1.40 U1.41 U1.42 U1.43 U1.51 U1.52 U1.54 U1.55 U1.61 U1.62 U2.2 U2.3 U2.4 U2.10 U2.11 U2.12 U2.13 U2.16 U2.20 U2.21 U2.22 U2.25 U2.26 U2.27 U2.28 U2.29 U2.32 U2.33 U2.38 U2.39 U2.40 U2.41 U2.42 U2.43 U2.45 U2.46 USB1. USB1.A5 USB1.A8 USB1.B5 USB1.B8

## Keep-outs
Keep-Out Layer:
  circle w10: c2134.92,3634.88 r393.7
  circle w10: c4660.48,4146.69 r59.06
  circle w10: c2134.92,3634.88 r295.28
  circle w10: c3794.38,2174.27 r70.87
  circle w10: c4424.26,2174.27 r70.87
  circle w10: c4109.32,1859.33 r70.87
  circle w10: c3479.43,1859.33 r70.87
  circle w10: c1623.11,1623.11 r59.06
  circle w10: c4660.48,1623.11 r59.06
  circle w10: c1623.11,4146.69 r118.11
  circle w10: c1623.11,1623.11 r118.11
  circle w10: c4660.48,1623.11 r118.11
  circle w10: c4660.48,4146.69 r118.11
  circle w10: c1623.11,4146.69 r59.06
  lines w10: 1505,1623.11 ccw(c1623.11,1623.11) 1623.11,1505 ; 1505,4146.69 cw(c1623.11,4146.69) 1623.11,4264.8 ; 4660.48,1505 ccw(c4660.48,1623.11) 4778.59,1623.11 ; 4660.48,4264.8 cw(c4660.48,4146.69) 4778.59,4146.69

## Silkscreen, mask and mechanical layers (free items; w line width, h text height)
Top Overlay:
  lines w9 net S$81355: 3413.71,3902.9 3812.71,3902.9 3812.71,4074.4 3426.01,4074.4 3413.71,4074.4 3413.71,3902.9
  text "GND" at 3510.26,3933.9 h45 r90
  text "CLK" at 3610.26,3933.9 h45 r90
  text "DIO" at 3710.26,3933.9 h45 r90
  text "3V3" at 3810.26,3933.9 h45 r90
Bottom Overlay:
  text "JLCJLCJLCJLC" at 4363.76,3282.4 h45

## Text inside footprints (layer, text, board x,y; h text height)
K1: Bottom Overlay "DOUT" at 2169.74,2638.71 h23.62 r180; Bottom Overlay "DIN" at 1824.74,2573.71 h23.62 r180; Bottom Overlay "VCC" at 2169.74,2573.71 h23.62 r180; Bottom Overlay "GND" at 1809.74,2638.71 h23.62 r180
K2: Bottom Overlay "DOUT" at 2919.76,2638.71 h23.62 r180; Bottom Overlay "DIN" at 2574.76,2573.71 h23.62 r180; Bottom Overlay "VCC" at 2919.76,2573.71 h23.62 r180; Bottom Overlay "GND" at 2559.76,2638.71 h23.62 r180
K3: Bottom Overlay "DOUT" at 3669.77,2638.71 h23.62 r180; Bottom Overlay "DIN" at 3324.77,2573.71 h23.62 r180; Bottom Overlay "VCC" at 3669.77,2573.71 h23.62 r180; Bottom Overlay "GND" at 3309.77,2638.71 h23.62 r180
K4: Bottom Overlay "DOUT" at 4419.79,2638.71 h23.62 r180; Bottom Overlay "DIN" at 4074.79,2573.71 h23.62 r180; Bottom Overlay "VCC" at 4419.79,2573.71 h23.62 r180; Bottom Overlay "GND" at 4059.79,2638.71 h23.62 r180